# Altium PCB mainPower.PcbDoc
Units mil, origin at the board's own origin, x right, y up, seen from the top; angles counter-clockwise.
Board outline 2800 x 1865 mil, 2 copper layers (Top Layer, Bottom Layer), stack 65.792 mil thick; 57 components, 26 nets, 176 pads, 320 vias.
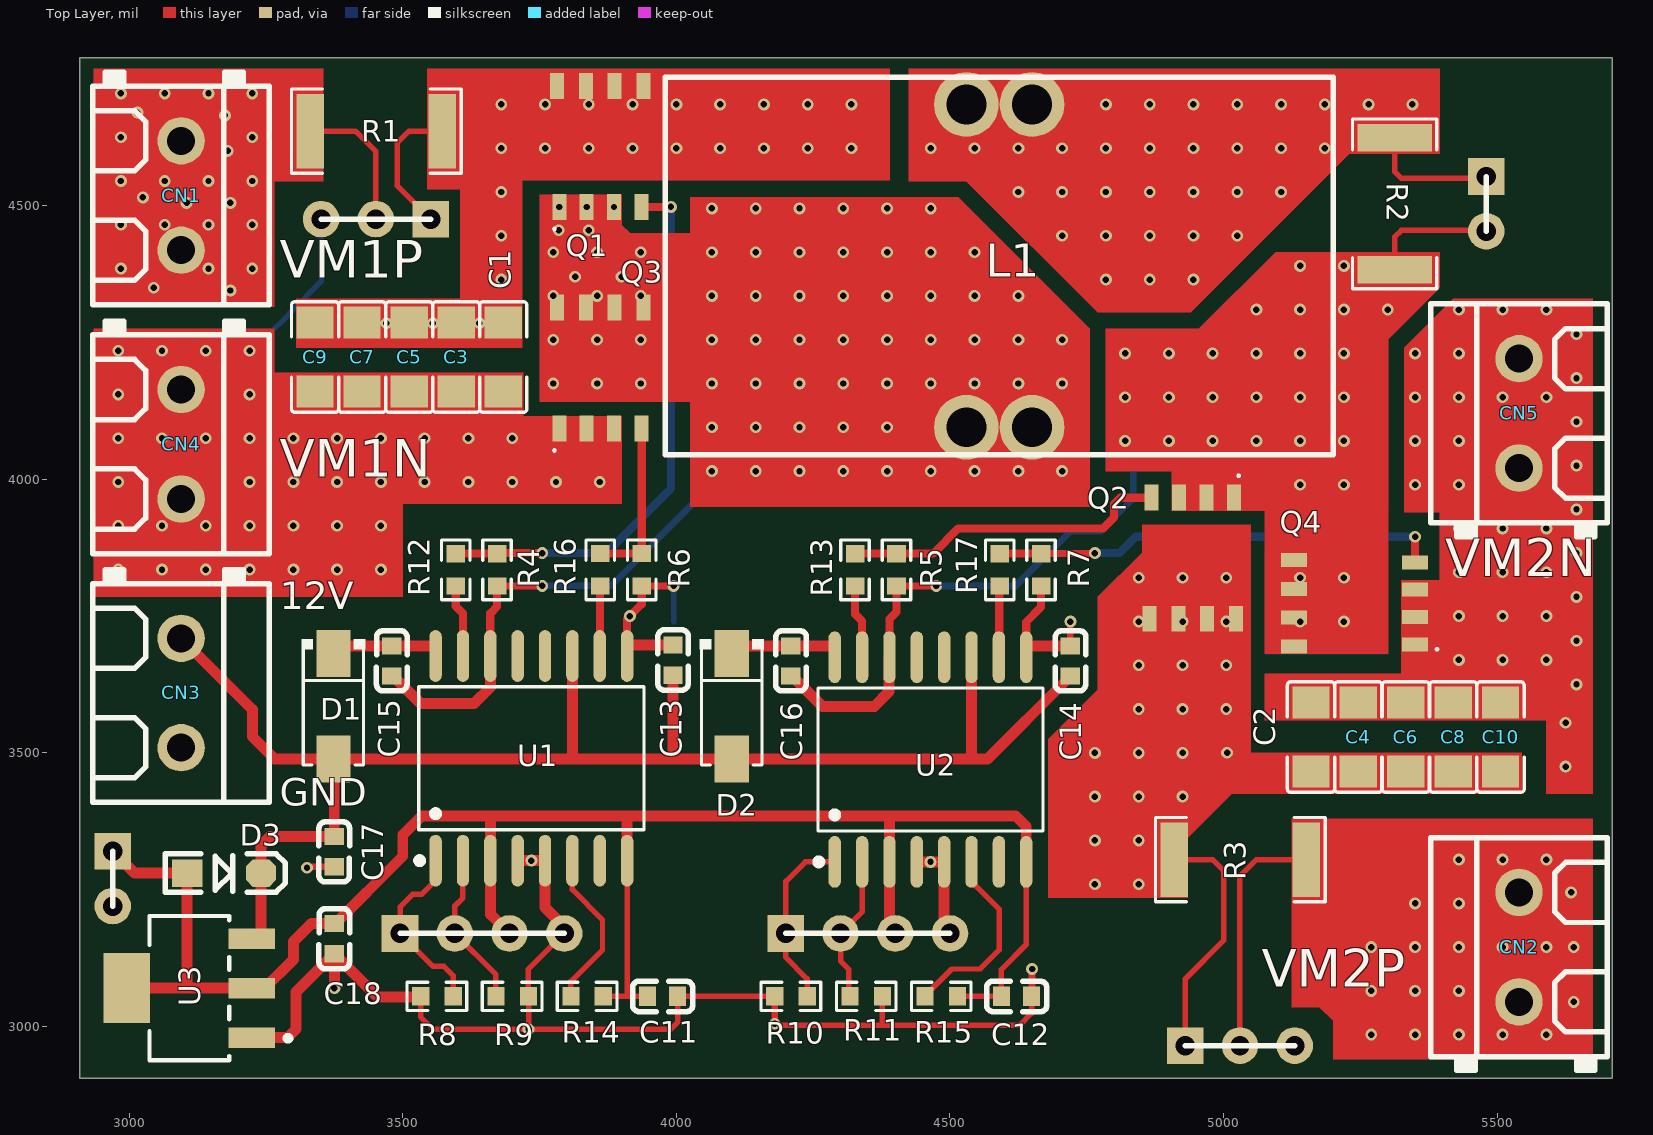
[diagram p0: Top Layer view]
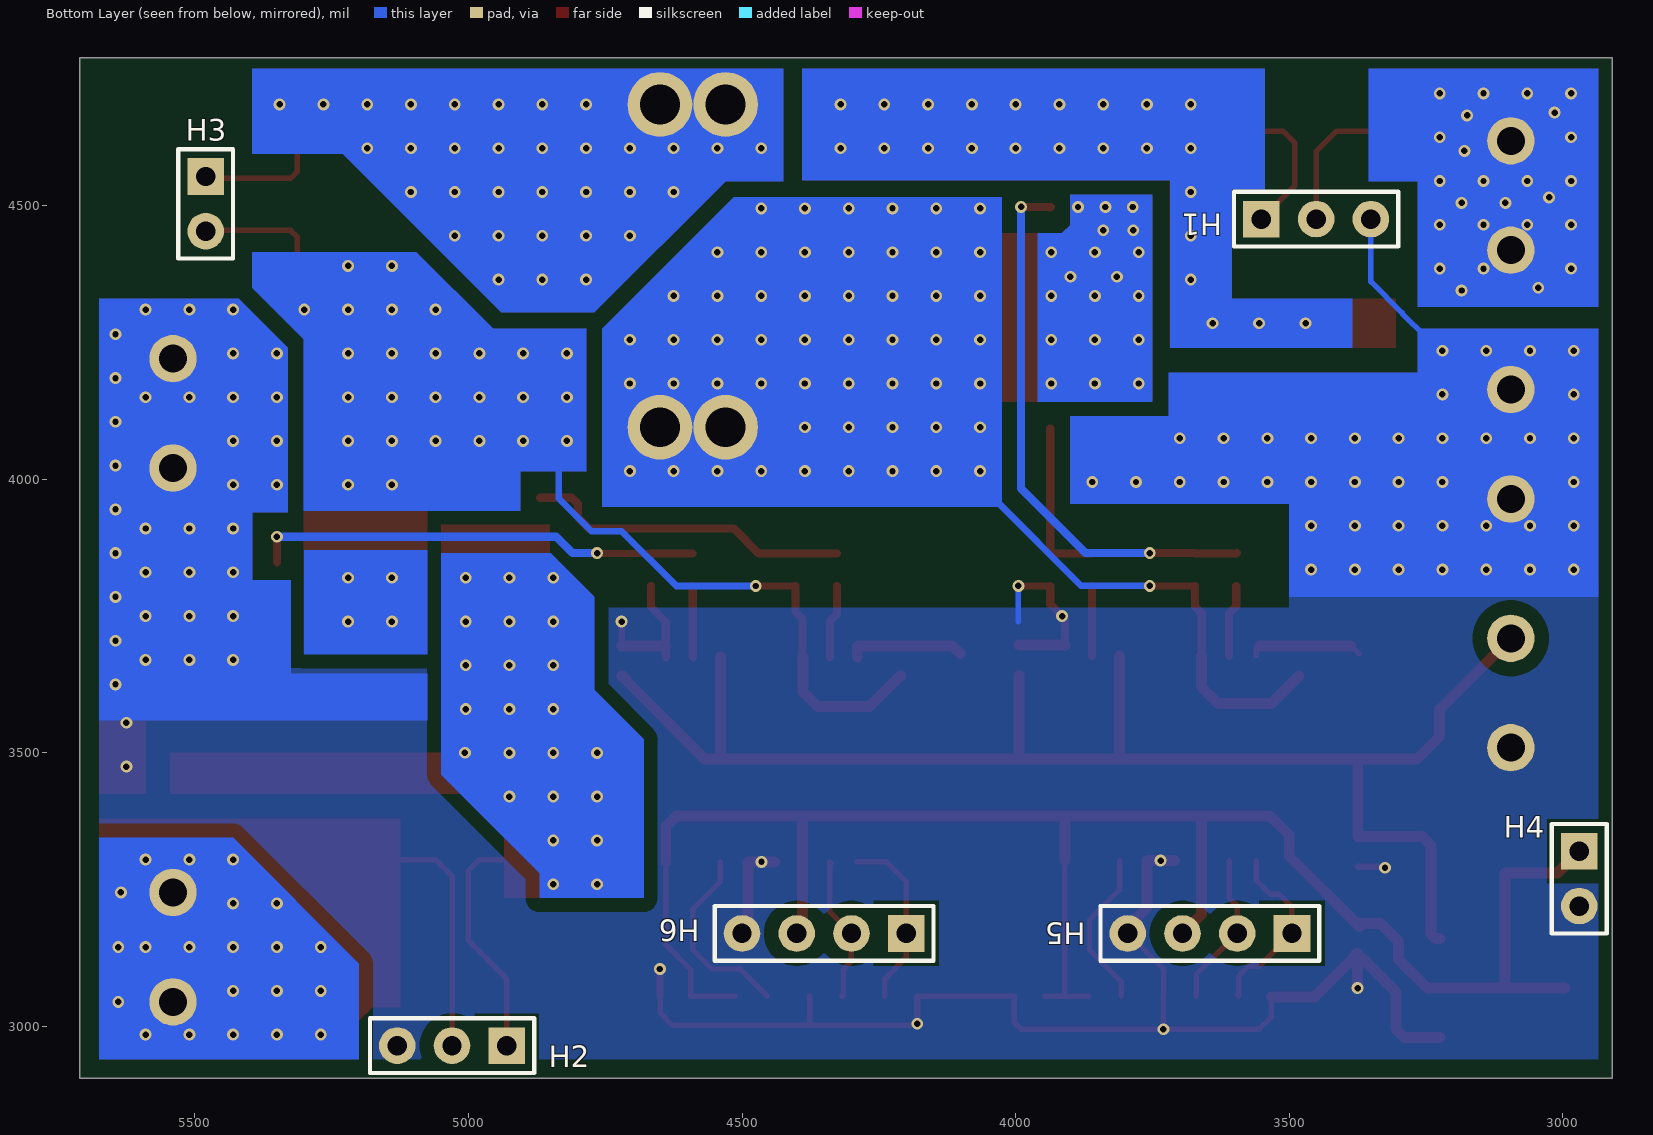
[diagram p1: Bottom Layer view, seen from below]

## Layer stack, top to bottom
Top Solder: solder mask 0.4, Solder Resist, Dk 3.5
Top Layer: signal copper 1.4
Dielectric 1: dielectric 62.9921, FR-4, Dk 4.8
Bottom Layer: signal copper 1.4
Bottom Solder: solder mask 0.4, Solder Resist, Dk 3.5

## Board outline
2910,2905 5710,2905 5710,4770 2910,4770

## Design rules (kind name [scope] priority, off if disabled: settings)
Clearance Clearance_1 [InNamedPolygon('C1N_L02_P000')] p1: gap=26 ignorepadtopadclearanceinfootprint=FALSE
Clearance [All] p2: gap=19.68 ignorepadtopadclearanceinfootprint=TRUE except(7.87: Arc-Arc Arc-Track Arc-SMDPad Arc-THPad Arc-Via Arc-Fill Arc-Poly Arc-Region Arc-Text Arc-Hole Track-Track Track-SMDPad Track-THPad Track-Via Track-Fill Track-Poly Track-Region Track-Text Track-Hole)
PolygonConnect PolygonConnect_3 [All vs IsNamedPolygon('C1N_L02_P000')] p1: connectstyle=Direct reliefconductorwidth=10 reliefentries=4 polygonreliefangle="90 Angle" airgapwidth=10
PolygonConnect PolygonConnect_2 [All vs IsNamedPolygon('NONET_L02_P000')] p2: connectstyle=Direct reliefconductorwidth=10 reliefentries=4 polygonreliefangle="90 Angle" airgapwidth=10
PolygonConnect PolygonConnect_1 [All vs IsNamedPolygon('NONET_L02_P000')] p3: connectstyle=Direct reliefconductorwidth=10 reliefentries=4 polygonreliefangle="90 Angle" airgapwidth=10
PolygonConnect [All] p4: connectstyle=Relief reliefconductorwidth=10 reliefentries=4 polygonreliefangle="90 Angle" airgapwidth=10
RoutingVias [All] p1: holewidth=28 width=50 viastyle="Through Hole" minholewidth=28 minwidth=50 maxholewidth=28 maxwidth=50
SolderMaskExpansion [All] p1: expansion=4 istentingtop=FALSE
Width [All] p1: maxlimit=50 minlimit=8 preferedwidth=15
30 further rules are at their usual default settings.

## Components (designator, comment, footprint, x,y, rotation, side; value= is the part's Value field where it differs from the comment)
C1 "22uF100V" C1206 3683.6,4223.36 r270 top
C2 "22uF100V" C1206 5159.66,3528.92 r90 top
C3 "22uF100V" C1206 3597.64,4223.36 r270 top
C4 "22uF100V" C1206 5246.32,3528.92 r90 top
C5 "22uF100V" C1206 3511.68,4223.36 r90 top
C6 "22uF100V" C1206 5332.99,3528.92 r270 top
C7 "22uF100V" C1206 3425.72,4223.36 r270 top
C8 "22uF100V" C1206 5419.65,3528.92 r90 top
C9 "22uF100V" C1206 3339.76,4223.36 r270 top
C10 "22uF100V" C1206 5506.32,3528.92 r90 top
C11 "470nF" C0603 3974.67,3055 r180 top
C12 "470nF" C0603 4621.67,3055 r180 top
C13 "470nF" C0603 3993.89,3669.43 r270 top
C14 "470nF" C0603 4720.16,3667.94 r270 top
C15 "100nF" C0603 3479.85,3667.94 r270 top
C16 "100nF" C0603 4209.38,3667.94 r270 top
C17 "1uF" C0603 3374.79,3319.43 r90 top
C18 "1uF" C0603 3375,3160.57 r90 top
CN1 "1729128" CONN-TH_2P-P5.08 3095,4518.58 r270 top
CN2 "1729128" CONN-TH_2P-P5.08 5540,3145 r90 top
CN3 "1729128" CONN-TH_2P-P5.08 3095,3609.42 r270 top
CN4 "1729128" CONN-TH_2P-P5.08 3095,4064 r270 top
CN5 "1729128" CONN-TH_2P-P5.08 5540,4120.37 r90 top
D1 "SS54" SMA 3373.25,3585.1 r90 top
D2 "SS54" SMA 4101.22,3585.1 r90 top
D3 "1N5819W(SOD-123)" SOD-123 3173.56,3280.29 r0 top
H1 "Header-Male-2.54_1x3" HDR2.54-LI-3P 3450.8,4475.49 r180 bottom
H2 "Header-Male-2.54_1x3" HDR2.54-LI-3P 5030,2965 r0 bottom
H3 "Header-Male-2.54_1x2" HDR2.54-LI-2P 5480.15,4503.3 r270 bottom
H4 "Header-Male-2.54_1x2" HDR2.54-LI-2P 2970,3270 r270 bottom
H5 "Header-Male-2.54_1x4" HDR2.54-LI-4P 3645,3170 r0 bottom
H6 "Header-Male-2.54_1x4" HDR2.54-LI-4P 4350,3170 r0 bottom
L1 "47uH 30A" 106-125立式 4530,4215 r0 top
Q1 "BSC070N10NS3 G" INF-PG-TDSON-8-1_V 3860.99,4608.81 r0 top
Q2 "BSC070N10NS3 G" INF-PG-TDSON-8-1_V 4943.64,3855.15 r180 top
Q3 "BSC070N10NS3 G" INF-PG-TDSON-8-1_V 3860.99,4203.78 r0 top
Q4 "BSC070N10NS3 G" INF-PG-TDSON-8-1_V 5238.62,3773.34 r90 top
R1 "0.0035 ohm" R2512 3451.71,4636.37 r0 top
R2 "0.0035 ohm" R2512 5312.82,4503.3 r270 top
R3 "0.0035 ohm" R2512 5030.72,3305 r0 top
R4 "10k" R0603 3672.34,3834.57 r90 top
R5 "10k" R0603 4402.3,3834.57 r270 top
R6 "10k" R0603 3936.62,3834.57 r90 top
R7 "10k" R0603 4666.58,3834.57 r90 top
R8 "10k" R0603 3562.38,3055 r180 top
R9 "10k" R0603 3700,3055 r0 top
R10 "10k" R0603 4209.38,3055 r180 top
R11 "10k" R0603 4347,3055 r0 top
R12 "10 ohm" R0603 3596.66,3834.57 r90 top
R13 "10 ohm" R0603 4326.63,3834.57 r90 top
R14 "3.3k" R0603 3837.05,3055 r180 top
R15 "3.3k" R0603 4484.05,3055 r180 top
R16 "10 ohm" R0603 3860.99,3834.57 r90 top
R17 "10 ohm" R0603 4590.95,3834.57 r90 top
U1 "SI8233BD-D-IS" SOIC-16_L10.3-W7.5-P1.27-LS10.3-BL 3735,3490 r0 top
U2 "SI8233BD-D-IS" SOIC-16_L10.3-W7.5-P1.27-LS10.3-BL 4464.4,3487.83 r0 top
U3 "TLV1117-50IDCY" FP-DCY0004A-MFG 3110,3070 r180 top

## Footprints (in the part's own frame and the unit in brackets; to place one, negate y for a bottom-side part, rotate by r counter-clockwise, add the part's x,y. Pads: shape width x height; smd on the part's side, far side on the other; paste and mask are expansions set on the pad)
106-125立式 [mm]
  round 3 hole 1.85: 1(0,-3.048) 1(3.048,-3.048) 2(0,11.938) 2(3.048,11.938)
  silkscreen extent -13.98,-4.32 17.02,13.21
C0603 [mm]
  rect 0.8x0.9 smd: 1(-0.7,0) 2(0.7,0)
  silkscreen extent -1.41,-0.71 1.39,0.72, body extent -0.8,-0.4 0.8,0.4, height 0.81
C1206 [mm]
  rect 1.485x1.728 smd: 1(-1.593,0) 2(1.593,0)
  silkscreen extent -2.56,-1.09 2.56,1.09, body extent -1.7,-0.91 1.7,0.91, height 0.89
CONN-TH_2P-P5.08 [mm]
  round 2.2 hole 1.3 mask+0.051: 1(-2.54,0) 2(2.54,0)
  silkscreen extent -5.72,-4.1 5.08,4.1
FP-DCY0004A-MFG [mm]
  rect 2.15x0.95 smd paste+0 mask+0: 1(-2.9,2.3) 2(-2.9,0) 3(-2.9,-2.3)
  rect 2.15x3.25 smd paste+0 mask+0: 4(2.9,0)
  silkscreen extent -4.7,-3.35 1.85,3.35, body extent -4.08,-3.45 4.08,3.45, height 0.25
HDR2.54-LI-2P [mm] "排针，2脚"
  rect 1.7x1.7 hole 0.9: 1(-1.27,0)
  round 1.7 hole 0.9: 2(1.27,0)
  silkscreen extent -2.54,-1.27 2.54,1.27, body extent -2.54,-1.27 2.54,1.27, height 8.5
HDR2.54-LI-3P [mm] "排针，3脚"
  rect 1.7x1.7 hole 0.9: 1(-2.54,0)
  round 1.7 hole 0.9: 2(0,0) 3(2.54,0)
  silkscreen extent -3.81,-1.27 3.81,1.27, body extent -3.81,-1.27 3.81,1.27, height 8.5
HDR2.54-LI-4P [mm] "排针，4脚"
  rect 1.7x1.7 hole 0.9: 1(-3.81,0)
  round 1.7 hole 0.9: 2(-1.27,0) 3(1.27,0) 4(3.81,0)
  silkscreen extent -5.08,-1.27 5.08,1.27, body extent -5.08,-1.27 5.08,1.27, height 8.5
INF-PG-TDSON-8-1_V [mm] "TDSON, 8-Leads, Body 6.15x5.15mm, Pitch 1.27mm"
  rect 0.65x1.2 smd: 1(-1.905,-2.825) 2(-0.635,-2.825) 3(0.635,-2.825) 4(1.905,-2.825) 5(2.007,2.794) 6(0.66,2.794) 7(-0.66,2.794) 8(-2.007,2.794)
  Top Layer region: 0.315,2.925 1.015,2.925 1.015,3.425 0.315,3.425
  Top Layer region: -1.015,2.925 -0.315,2.925 -0.315,3.425 -1.015,3.425
  Top Layer region: 1.65,2.925 2.35,2.925 2.35,3.425 1.65,3.425
  Top Layer region: -2.35,2.925 -1.65,2.925 -1.65,3.425 -2.35,3.425
  Top Layer region: -2.35,2.925 -2.35,-1.575 2.35,-1.575 2.35,2.925
  silkscreen extent -2.23,-3.94 -2.03,-3.74, body extent -2.58,-3.08 2.58,3.08, height 1
R0603 [mil]
  rect 31.75x34.02 smd: 1(-29.66,0) 2(29.65,0)
  silkscreen extent -55,-26 55,26, body extent -31,-16 31,16, height 9
R2512 [mil]
  rect 50.49x136.06 smd: 1(-120.72,0) 2(120.72,0)
  silkscreen extent -155,-77 155,77, body extent -124,-63 124,63, height 24
SMA [mm]
  rect 2.185x1.593 smd: 1(-2.442,0) 2(2.442,0)
  silkscreen extent -2.73,-1.48 3.11,1.48, body extent -2.6,-1.3 2.6,1.3, height 2
SOD-123 [mil] "2.7x1.6X1.1mm（长宽高，不包括引脚）"
  rect 55x50 smd: 1(-67.5,0)
  oct 55x50 smd: 2(67.5,0)
  silkscreen extent -108,-35 112,35, body extent -73,-31 73,31, height 48
SOIC-16_L10.3-W7.5-P1.27-LS10.3-BL [mil]
  oval 22.6x94.51 smd: 1(-175,-187.02) 2(-125,-187.02) 3(-75,-187.02) 4(-25,-187.02) 5(25,-187.02) 6(75,-187.02) 7(125,-187.02) 8(175,-187.02) 9(175,187.02) 10(125,187.02) 11(75,187.02) 12(25,187.02) 13(-25,187.02) 14(-75,187.02) 15(-125,187.02) 16(-175,187.02)
  silkscreen extent -210,-193 206,131

## Part data
C1 C2 C3 C4 C5 C6 C7 C8 C9 C10: library part C1206, BOM_JLCPCB Part Class="Basic Part", BOM_Manufacturer=FH, BOM_Manufacturer Part=1206B102K202NT, BOM_Supplier=LCSC, BOM_Supplier Part=C9196, nameAlias=Capacitance, spicePre=C, spiceSymbolName=1206B102K202NT
C11 C12 C13 C14 C15 C16 C17 C18: library part C0603, BOM_JLCPCB Part Class="Basic Part", BOM_Manufacturer=YAGEO, BOM_Manufacturer Part=CC0603KRX7R9BB104, BOM_Supplier=LCSC, BOM_Supplier Part=C14663, nameAlias=Capacitance, spicePre=C, spiceSymbolName=CC0603KRX7R9BB104
CN1 CN2 CN3 CN4 CN5: library part MKDSN5.08-2P, "间距:5.08mm;排数:1;每排PIN数:2;安装方式:直针;额定电流:13.5A;额定电压:400V;工作温度范围:-;颜色:绿色;", Color=绿色, Current Rating (Max)=13.5A, JLCPCB Part Class="Extended Part", LCSC Part Name="5.08mm 排数:1 每排P数:2 直针", Manufacturer="Phoenix Contact(菲尼克斯)", Operating Temperature Range=-, Voltage Rating (Max)=400V, Add into BOM=yes, Convert to PCB=yes, Datasheet=https://atta.szlcsc.com/upload/public/pdf/source/20161226/1482720163948.pdf, Device=1729128, Manufacturer Part=1729128, Mounting Style=直针, Number of PINs Per Row=2, Number of Rows=1, Pitch=5.08mm, Supplier=LCSC, Supplier Footprint=插件,P=5.08mm, Supplier Part=C91153, Symbol=MKDSN1.5/2-5.08
D1 D2: library part SS34(SMA), BOM_JLCPCB Part Class="Extended Part", BOM_Manufacturer=Doeshare(德芯), BOM_Manufacturer Part=SS34, BOM_Supplier=LCSC, BOM_Supplier Part=C2931787, Contributor=LCSC, spicePre=D, spiceSymbolName=SS34_C2931787
D3: BOM_JLCPCB Part Class="Extended Part", BOM_Manufacturer=Doeshare(德芯), BOM_Manufacturer Part=SS34, BOM_Supplier=LCSC, BOM_Supplier Part=C2931787, Contributor=LCSC, spicePre=D, spiceSymbolName=SS34_C2931787
H1 H2 H3 H4: BOM_JLCPCB Part Class="Extended Part", BOM_Manufacturer=BOOMELE, BOM_Manufacturer Part="Header2.54mm 1*3P", BOM_Supplier=LCSC, BOM_Supplier Part=C49257, spicePre=H, spiceSymbolName=Header-Male-2.54_1x3
H5 H6: BOM_JLCPCB Part Class="Extended Part", BOM_Manufacturer="Boom Precision Elec", BOM_Manufacturer Part=C247921, BOM_Supplier=LCSC, BOM_Supplier Part=C247921, Contributor=LCSC, spicePre=H, spiceSymbolName=C247921
L1: library part 106-125铁硅铝磁环电感, BOM_JLCPCB Part Class="Extended Part", BOM_Manufacturer=FH(风华), BOM_Manufacturer Part=HA42-4R7MT, BOM_Supplier=LCSC, BOM_Supplier Part=C2936653, Contributor=LCSC, nameAlias=Inductance, spicePre=L, spiceSymbolName=HA42-4R7MT
Q1 Q2 Q3 Q4: library part BSC070N10NS3G, "N-Channel OptiMOS 3 Power-Transistor, 100 V VDS, 90 A ID, -55 to 150 degC, PG-TDSON-8-1, Reel, Green", Manufacturer=Infineon, ComponentLink1Description="Manufacturer URL", ComponentLink1URL=http://www.infineon.com/, ComponentLink2Description=Datasheet, ComponentLink2URL=http://www.infineon.com/dgdl/BSC070N10NS3+Rev2+1.pdf?folderId=db3a304313b8b5a60113cee8763b02d7&fileId=db3a304327b89750012824712c6c6f2f, ComponentLink3Description="Package Specification", ComponentLink3URL=http://www.infineon.com/cms/packages/SMD_-_Surface_Mounted_Devices/P-PG-TDSON/P-PG-TDSON-08-01x_2x_3.html?__locale=en, DatasheetVersion="Rev. 2.0", Green=TRUE, Halogen-free=TRUE, ID (max)="90Â A", IDpuls (max)="360Â A", Manufacturer Part Number=BSC070N10NS3G, Mounting Technology="Surface Mount", PackageDescription="8-Pin Plastic (Green) Thin Dual Small Outline Non-Leaded Package, 5.15 x 5.9 mm Body, 1.27 mm Pitch", PackageReference=PG-TDSON-8-1, Packing=Reel, PartNumber="BSC070N10NS3 G", Polarity=N, Ptot (max)="114Â W", QG="42Â nC", RDS (on) (max)="7Â mOhm", Rth="1.1Â K/W", RthJA (max)="50Â K/W", RthJC (max)="1.1Â K/W", VDS (max)="100Â V", VGS(th) (max)="3.5Â V", VGS(th) (min)="2Â V"
R1 R2 R3: library part R2512, BOM_JLCPCB Part Class="Extended Part", BOM_Manufacturer=YAGEO, BOM_Manufacturer Part=SR2512FK-0751RL, Resistance=51Ω, BOM_Supplier=LCSC, BOM_Supplier Part=C375694, Contributor=LCSC, nameAlias="Resistance (Ohms)", spicePre=R, spiceSymbolName=SR2512FK-0751RL
R4 R5 R6 R7 R8 R9 R10 R11 R12 R13 R14 R15 R16 R17: library part R0603, BOM_JLCPCB Part Class="Extended Part", BOM_Manufacturer=YAGEO, BOM_Manufacturer Part=SR0603JR-071RL, Resistance=1Ω, BOM_Supplier=LCSC, BOM_Supplier Part=C326890, Contributor=LCSC, nameAlias="Resistance (Ohms)", spicePre=R, spiceSymbolName=SR0603JR-071RL
U1 U2: "高速隔离半桥栅极驱动器", JLCPCB Part Class="Extended Part", Manufacturer="SILICON LABS(芯科)", Add into BOM=yes, Convert to PCB=yes, Datasheet=https://atta.szlcsc.com/upload/public/pdf/source/20190920/C430246_81ACDC97509C517087989819A83AC3BD.pdf, Device=SI8233BD-D-IS, LCSC Part Name=SI8233BD-D-IS, Manufacturer Part=SI8233BD-D-IS, Name=SI8233BD-D-IS, Supplier=LCSC, Supplier Footprint=SOIC-16_W, Supplier Part=C430246, Symbol=SI8233BD-D-IS
U3: library part CMP-04917-000165-1, "IC REG LINEAR 5V 800MA SOT223-4", Case/Package=SOT-223, Dropout Voltage=1.2V, Input Bias Current=5mA, Max Input Voltage=15V, Max Operating Temperature=125°C, Max Output Current=800mA, Min Input Voltage=6.4V, Min Operating Temperature=-40°C, Nominal Output Voltage=5V, Package Quantity=80, Quiescent Current=15mA, Reference Voltage=5.2V, Height=1.7mm, Lead Free="Lead Free", Length=6.7mm, Min Current Limit=800mA, Mount="Surface Mount", Number of Outputs=1, Number of Pins=3, Number of Regulators=1, Output Current=800mA, Output Type=Fixed, Output Voltage=5V, Packaging=Rail/Tube, Polarity=Positive, Radiation Hardening=No, REACH SVHC="No SVHC", RoHS Compliant=Yes, Series=-, Width=3.7mm

## Via types
v1: diameter 21.65, hole 11.81, Top Layer to Bottom Layer, 320 vias

## Nets (pads, with @x,y where several pads share a name; then routed paths per layer and width w, separated by ;. In a path a pad name is that pad's centre, name@x,y a point inside that pad or via, vN(x,y) a via of type N, cw(c..) or ccw(c..) an arc to the next point about the centre after c; other vN are vias at no path point)
+5: C11.2 C12.2 C18.2 D3.1 H4.1 H5.3 H6.3 R14.1 R15.1 U1.3 U1.8 U2.3 U2.8 U3.2 U3.4 | length 3460.6
  Top Layer w10: R14.1 3906.91,3055 ; U1.8 3910,3058.09 3906.91,3055 ; C11.2 3906.91,3055 ; 4389.4,3385 4394.4,3385 ; R15.1 C12.2 4594.11,3104.11 4639.4,3149.4 U2.8
  Top Layer w20: H4.1 3009.71,3280.29 D3.1 3106.06,3073.94 3110,3070 ; U3.4 3110,3070 ; C18.2@3371.23,3182.39 3500,3311.16 3500,3350 3535,3385 3660,3385 ; C18.2 3333.13,3188.13 3300.12,3155.12 3300.12,3122.32 3247.8,3070 U3.2 3110,3070 ; H5.3 3660,3205 U1.3 3660,3385 ; U1.8 3910,3385 ; H6.3@4389.4,3170 U2.3 4389.4,3385 3910,3385 ; 4394.4,3385 4620,3385 4639.4,3365.6 U2.8 ; 3660,3385 3910,3385
+12: C13.2 C14.2 C17.2 CN3.1 D1.1 D2.1 D3.2 U1.11 U2.11 U3.3 | length 2801.9
  Top Layer w20: CN3.1 3225,3579.42 3225,3530 3266.06,3488.94 D1.1 ; U3.3 3232.35,3160.55 3241.06,3169.25 D3.2 3241.06,3331.06 3256.98,3346.98 C17.2 3374.79,3487.4 D1.1 ; U1.11 3810,3488.94 ; C13.2 3993.89,3490.05 3995,3488.94 ; U2.11 4539.4,3489.54 4540,3488.94 ; C14.2@4720,3640.22 4718.03,3640.22 4712.45,3634.64 4712.45,3632.67 4568.72,3488.94 4540,3488.94 ; D1.1 3810,3488.94 ; 3810,3488.94 3888.94,3488.94 3995,3488.94 ; 3995,3488.94 D2.1 4540,3488.94
A_HS: C15.2 L1.1 Q1.1 Q1.2 Q1.3 Q3.5 Q3.6 Q3.7 Q3.8 R4.1 U1.14 | length 833.3
  Top Layer w10: C15.2 C15.2@3481.82,3640.38
  Top Layer w12.13: R4.1 3755,3804.91 v1@3755,3805
  Top Layer w15: U1.14 3660,3755 3672.34,3767.34 R4.1
  Top Layer w20: C15.2@3481.82,3640.38 3532.2,3590 3630,3590 3660,3620 U1.14
  Bottom Layer w12.13: v1(3755,3805.09) 3880.09,3805.09 4037.05,3962.05
  other v1: 4065,4015 4145,4015 4225,4015 4305,4015 4385,4015 4465,4015 4545,4015 4625,4015 4705,4015 4065,4095 4145,4095 4225,4095 4305,4095 4385,4095 3775,4175 3855,4175 3935,4175 4065,4175 4145,4175 4225,4175 4305,4175 4385,4175 4465,4175 4545,4175 4625,4175 4705,4175 3775,4255 3855,4255 3935,4255 4065,4255 4145,4255 4225,4255 4305,4255 4385,4255 4465,4255 4545,4255 4625,4255 4705,4255 3775,4335 3855,4335 3935,4335 4065,4335 4145,4335 4225,4335 4305,4335 4385,4335 4465,4335 4545,4335 4625,4335 3815,4370 3900,4370 3775,4415 3855,4415 3935,4415 4065,4415 4145,4415 4225,4415 4305,4415 4385,4415 4465,4415 4545,4415 3785,4455 3840,4455 4065,4495 4145,4495 4225,4495 4305,4495 4385,4495 4465,4495 3785.99,4497.59 3835.99,4497.59 3885.99,4497.59
AmosH: Q1.4 R4.2 R12.2 | length 1018.3
  Top Layer w10: R4.2 R4.2@3673.12,3865
  Top Layer w12.13: Q1.4 Q1.4@3938.49,4495.09 ; v1@3990,4497.59 v1(3990,4497.68) v1@3990,4500
  Top Layer w15: R12.2@3595.83,3865.06 R12.2 R4.2 ; R4.2@3673.12,3865 v1@3755,3865 ; Q1.4 v1@3990,4497.59
  Bottom Layer w15: v1(3755,3865.09) 3872.07,3865.09 3990,3983.02 v1(3990,4497.68)
AmosL: Q3.4 R6.2 R16.2 | length 306
  Top Layer w10: R16.2@3860,3865.21 R16.2
  Top Layer w12.13: Q3.4 Q3.4@3936.62,4092.55
  Top Layer w15: R16.2 R6.2 Q3.4@3936.62,4092.55
B_HS: C16.2 H3.2 Q2.1 Q2.2 Q2.3 Q4.5 Q4.6 Q4.7 Q4.8 R2.2 R5.2 U2.14 | length 1214.4
  Top Layer w10: R2.2 5312.82,4442.82 5325,4455 5478.46,4455 H3.2
  Top Layer w12.13: R5.2 v1(4474.91,3804.91) v1@4475,3805
  Top Layer w15: U2.14 4389.4,3744.4 4402.3,3757.3 R5.2
  Top Layer w20: C16.2 4211.35,3640.38 4266.73,3585 4361.64,3585 4388.91,3612.27 4388.91,3674.35 U2.14
  Bottom Layer w12.13: v1(4474.91,3804.91) 4619.91,3804.91 4720,3905 4775,3905 4835,3965 4835,4035
  other v1: 5140,3740 5220,3740 5140,3820 5220,3820 5140,3990 5220,3990 4820,4070 4900,4070 4980,4070 5060,4070 5140,4070 5220,4070 4820,4150 4900,4150 4980,4150 5060,4150 5140,4150 5220,4150 4820,4230 4900,4230 4980,4230 5060,4230 5140,4230 5220,4230 5060,4310 5140,4310 5220,4310 5300,4310 5140,4390 5220,4390
BmosH: Q2.4 R5.1 R13.2 | length 599.2
  Top Layer w12.13: 4469.61,3864.22 4469.61,3864.61
  Top Layer w15: R13.2 R5.1 4469.61,3864.22 ; 4469.61,3864.61 4515,3910 4780,3910 4800,3930 4800,3955 4811.37,3966.37 Q2.4
BmosL: Q4.4 R7.2 R17.2 | length 818.5
  Top Layer w12.13: R7.2 4764.22,3864.22 v1(4765,3865) ; Q4.4 Q4.4@5350,3848.5
  Top Layer w15: R17.2 R7.2 ; Q4.4@5350,3848.5 v1(5350,3895)
  Bottom Layer w15: v1(4765,3865) 4810,3865 4840,3895 v1(5350,3895)
C1N: C1.2 C2.2 C3.2 C4.2 C5.1 C6.1 C7.2 C8.2 C9.2 C10.2 C11.1 C12.1 C13.1 C14.1 C17.1 C18.1 CN3.2 CN4.1 CN4.2 CN5.1 CN5.2 H1.3 H2.3 H4.2 H5.4 H6.4 Q3.1 Q3.2 Q3.3 Q4.1 Q4.2 Q4.3 R6.1 R7.1 R8.2 R9.2 R10.2 R11.2 U1.4 U1.5 U1.9 U2.4 U2.5 U2.9 U3.1 | length 3433.9
  Top Layer w10: R8.2 3532.72,3017.28 3555,2995 v1(3730,2995) ; H5.4 3729.66,3104.66 R9.2 3730,3054.66 v1(3730,2995) ; R10.2 C11.1 4002.22,3007.22 3990,2995 v1(3730,2995) ; v1@4181.49,3002.04 4182.22,3002.77 4190.19,3002.77 4190.93,3002.04 4375,3002.04 ; R11.2@4376.66,3056.13 R11.2 4376.66,3003.69 4375,3002.04 ; C12.1 4649.22,3024.22 4627.04,3002.04 4375,3002.04
  Top Layer w12.13: v1(3325,3290) 3325,3291.87 C17.1 ; R6.1 3995,3804.91 v1(3995,3805) ; v1(4179.73,3005) R10.2 ; C12.1 4650,3055 v1(4650,3105) ; v1(4720,3740) 4720.08,3739.92 4720.08,3695.58 C14.1
  Top Layer w15: U1.9@3910,3695.78 3910,3745 3936.62,3771.62 R6.1 ; U2.9 4639.4,3694.3 4639.4,3739.4 4666.58,3766.58 R7.1
  Top Layer w20: U3.1 3289.45,2979.45 3305,2995 3305,3063.02 C18.1@3367.28,3125.3 ; v1(3375,3070) C18.1 3376.97,3133.02 3382.72,3127.27 3382.72,3125.3 3454.15,3053.87 R8.2@3532.72,3053.87 ; U1.4 v1(3735,3302.98) U1.5 3760,3217.7 3795,3182.7 H5.4 ; U1.9@3910,3695.78 3911.2,3696.98 C13.1 ; U2.4 v1(4464.4,3300.81) U2.5 H6.4@4489.4,3170 ; U2.9@4639.4,3694.3 4640.6,3695.5 C14.1
  Bottom Layer w10: v1(3220,4235) 3245,4260 3250.48,4260 3293.62,4303.14 3293.62,4304.19 3350.8,4361.37 H1.3 ; 3995,3740 v1(3995,3805)
  other v1: 5625,3475 5625,3555 5645,3625 5430,3670 5510,3670 5590,3670 5645,3705 3915,3750 5430,3750 5510,3750 5590,3750 5645,3785 5430,3830 5510,3830 5590,3830 2980,3835 3060,3835 3140,3835 3220,3835 3300,3835 3380,3835 3460,3835 5645,3865 5430,3910 5510,3910 5590,3910 2980,3915 3060,3915 3140,3915 3220,3915 3300,3915 3380,3915 3460,3915 5645,3945 5350,3990 5430,3990 2980,3995 3220,3995 3300,3995 3380,3995 3460,3995 3540,3995 3620,3995 3700,3995 3780,3995 3860,3995 5645,4025 5350,4070 5430,4070 2980,4075 3060,4075 3140,4075 3220,4075 3300,4075 3380,4075 3460,4075 3540,4075 3620,4075 3700,4075 5645,4105 5350,4150 5430,4150 5510,4150 5590,4150 2980,4155 3220,4155 5645,4185 5350,4230 5430,4230 2980,4235 3060,4235 3140,4235 5645,4265 5430,4310 5510,4310 5590,4310
C1P: C1.1 C3.1 C5.2 C7.1 C9.1 H1.1 Q1.5 Q1.6 Q1.7 Q1.8 R1.2 | length 256
  Top Layer w10: H1.1 3490,4536.28 3490,4615 3511.37,4636.37 R1.2
  other v1: 3470,4285 3555,4285 3640,4285 3680,4365 3680,4445 3680,4525 3680,4605 3760,4605 3840,4605 3920,4605 4000,4605 4080,4605 4160,4605 4240,4605 4320,4605 3680,4685 3760,4685 3840,4685 3920,4685 4000,4685 4080,4685 4160,4685 4240,4685 4320,4685
C2P: C2.1 C4.1 C6.2 C8.1 C10.1 H2.1 Q2.5 Q2.6 Q2.7 Q2.8 R3.1 | length 447.3
  Top Layer w10: R3.1 4980,3305 5000,3285 5000,3157.18 4930,3087.18 H2.1
  other v1: 4765,3260 4845,3260 4765,3340 4845,3340 4765,3420 4845,3420 4925,3420 4765,3500 4845,3500 4925,3500 5006.54,3500.21 4845,3580 4925,3580 5005,3580 4845,3660 4925,3660 5005,3660 4845,3740 4925,3740 5005,3740 4845,3820 4925,3820 5005,3820
Iin+: CN1.1 CN1.2 H1.2 R1.1 | length 258.9
  Top Layer w10: R1.1 3413.63,4636.37 3450.8,4599.2 H1.2
  other v1: 3185,4345 3045,4350 2985,4385.09 3145,4385.09 3225,4385.09 2985,4465.09 3065,4465.09 3145,4465.09 3225,4465.09 3105,4505 3185,4505 3025,4515 2985,4545.09 3065,4545.09 3145,4545.09 3225,4545.09 3180,4600 2985,4625.09 3225,4625.09 3175,4665 3015,4670 2985,4705.09 3065,4705.09 3145,4705.09 3225,4705.09
IL+: H3.1 L1.2 R2.1 | length 235.6
  Top Layer w10: R2.1 5312.82,4562.18 5325,4550 5476.85,4550 H3.1
  other v1: 4785,4365 4865,4365 4945,4365 4705,4445 4785,4445 4865,4445 4945,4445 5025,4445 4625,4525 4705,4525 4785,4525 4865,4525 4945,4525 5025,4525 5105,4525 4465,4605 4545,4605 4625,4605 4705,4605 4785,4605 4865,4605 4945,4605 5025,4605 5105,4605 5185,4605 4785,4685 4865,4685 4945,4685 5025,4685 5105,4685 5185,4685 5265,4685 5345,4685
Iout-: CN2.1 CN2.2 H2.2 R3.2 | length 444.2
  Top Layer w10: H2.2@5029.19,2965 5029.19,3274.19 5060,3305 R3.2
  other v1: 5270,2985 5350,2985 5430,2985 5510,2985 5590,2985 5640,3045 5270,3065 5350,3065 5430,3065 5270,3145 5350,3145 5430,3145 5510,3145 5590,3145 5640,3145 5350,3225 5430,3225 5635,3245 5430,3305 5510,3305 5590,3305
NetC15_1: C15.1 D1.2 U1.16 | length 207.7
  Top Layer w10: D1.2 D1.2@3387.48,3695.49 ; U1.16@3554.18,3695.49 3560,3689.67 U1.16
  Top Layer w20: D1.2@3387.48,3695.49 C15.1 U1.16@3554.18,3695.49
NetC16_1: C16.1 D2.2 U2.16 | length 214
  Top Layer w20: D2.2 4115.45,3695.49 C16.1 4288.2,3695.49 4289.4,3694.29 U2.16
NetR12_1: R12.1 U1.15 | length 133.4
  Top Layer w15: R12.1 3596.66,3768.34 3610,3755 U1.15
NetR13_1: R13.1 U2.15 | length 135.4
  Top Layer w15: R13.1 4326.63,3753.37 4339.4,3740.6 U2.15
NetR14_2: R14.2 U1.6 | length 294.6
  Top Layer w10: R14.2 3807.39,3082.39 3865,3140 3865,3195 3810.08,3249.92 3810.08,3302.9 U1.6
NetR15_2: R15.2 U2.6 | length 353.2
  Top Layer w10: R15.2 4454.39,3056.13 4503.26,3105 4555,3105 4590,3140 4590,3214.26 4539.4,3264.85 U2.6
NetR16_1: R16.1 U1.10 | length 128.3
  Top Layer w15: U1.10 3860.49,3677.51 3860.49,3804.42 R16.1
NetR17_1: R17.1 U2.10 | length 130.7
  Top Layer w15: U2.10 4590.18,3675.62 4590.18,3804.14 R17.1
PWMAH: H5.1 R8.1 U1.1 | length 340.1
  Top Layer w10: U1.1 3560,3267.03 3534.51,3241.54 3518.07,3241.54 3495,3218.46 H5.1 3555,3110 3575,3110 3592.03,3092.97 R8.1 R8.1@3594.62,3057.58
PWMAL: H5.2 R9.1 U1.2 | length 285.4
  Top Layer w10: U1.2 3610,3235 3595,3220 H5.2 3670.34,3094.66 R9.1
PWMBH: H6.1 R10.1 U2.1 | length 330.4
  Top Layer w10: R10.1 4239.03,3087.01 4200,3126.04 H6.1 4200,3265 4235.81,3300.81 U2.1
PWMBL: H6.2 R11.1 U2.2 | length 272.7
  Top Layer w10: R11.1 4315,3057.35 4315,3105 4300,3120 H6.2 4339.4,3209.4 U2.2 U2.2@4336.99,3298.4
pads on no net: U1.7 U1.12 U1.13 U2.7 U2.12 U2.13

## Polygon pours and split planes (outlines as drawn)
C1N on Bottom Layer "C1N_L02_P000" (solid, remove dead copper, pour order 0): 2935,3810 3500,3810 3500,3765 4970,3765 4970,3655 5675,3655 5675,2940 2935,2940 2935,3145

## Other copper
Top Layer:
  region net C1N: 5075,3645 5075,3560 5675,3560 5675,4330 5420,4330 5330,4240 5330,3940 5395,3940 5395,3815 5325,3815 5325,3645
  region net A_HS: 3895,4470 3920,4445 3895,4445
  region net C2P: 4935,3235 4680,3235 4680,3525 4770,3615 4770,3785 4851.12,3866.12 4851.12,3917.16 5050,3917.16 5050,3500 5545,3500 5545,3425 5015,3425 4935,3345
  region net C1P: 3305,4330 3305,4240 3717.93,4240 3717.93,4546.8 4390,4546.8 4390,4750 3630,4750 3605,4750 3605,4330
  region net C1P: 3617.5,4750 3545,4750 3545,4530 3620,4530
  region net A_HS: 3945,4450 4025,4450 4025,4515 4515,4515 4755,4275 4755,3950 4025,3950 4025,4141.77 3945,4141.77
  region net IL+: 4425,4545 4425,4750 5395,4750 5395,4595 5230,4595 4940,4305 4770,4305 4530,4545
  region net Iin+: 2935,4315 3265,4315 3265,4545 3355,4545 3355,4750 3280,4750 2935,4750
  region net C1N: 5675,3425 5590,3425 5590,3570 5675,3570
  region net Iout-: 5125,3035 5175,3035 5200,3010 5200,2940 5675,2940 5675,3380 5125,3380
  region net B_HS: 5395,4415 5095,4415 4955,4275 4785,4275 4785,4015 4905,4015 4905,3942.25 5075,3942.25 5075,3680.82 5300.62,3680.82 5300.62,4255.62 5395,4350
  region net A_HS: 3750,4520 3750,4141.77 3960,4141.77 3960,4450 3900,4450 3900,4520
  region net C1N: 2935,4275 2935,3785 3500,3785 3500,3955 3900,3955 3900,4115 3720,4115 3720,4195 3265,4195 3265,4275
Bottom Layer:
  region net A_HS: 3895,4470 3920,4445 3895,4445
  region net C1P: 3385,4330 3385,4240 3717.44,4240 3717.44,4546.32 4390,4546.32 4390,4750 3630,4750 3605,4750 3605,4330
  region net C1P: 3617.5,4750 3545,4750 3545,4530 3620,4530
  region net A_HS: 4025,4515 4025,3950 4755,3950 4755,4275 4515,4515
  region net IL+: 4425,4545 4425,4750 5395,4750 5395,4595 5230,4595 4940,4305 4770,4305 4530,4545
  region net Iin+: 2935,4315 3265,4315 3265,4460 3265,4545 3355,4545 3355,4750 3280,4750 2935,4750
  region net C1N: 5075,3645 5075,3560 5675,3560 5675,4330 5420,4330 5330,4240 5330,3940 5395,3940 5395,3815 5325,3815 5325,3645
  region net Iout-: 5200,3115 5200,2940 5675,2940 5675,3345 5430,3345
  region net C2P: 4770,3785 4850,3865 5050,3865 5050,3520 5050,3460 4870,3280 4870,3235 4680,3235 4680,3525 4770,3615
  region net B_HS: 5300,3680 5300,3870 5075,3870 5075,3680
  region net B_HS: 5395,4415 5095,4415 4955,4275 4785,4275 4785,4015 4905,4015 4905,3942.6 5300.62,3942.6 5300.62,4255.62 5395,4350
  region net A_HS: 3750,4520 3750,4141.77 3960,4141.77 3960,4450 3900,4450 3900,4520
  region net C1N: 2935,4275 2935,3785 3500,3785 3500,3955 3900,3955 3900,4115 3720,4115 3720,4195 3265,4195 3265,4275

## Silkscreen, mask and mechanical layers (free items; w line width, h text height)
Top Overlay:
  lines w10: 2970,3220 2970,3320 ; 3350.8,4475.49 3550.8,4475.49 ; 3495,3170 3795,3170 ; 4200,3170 4500,3170 ; 4930,2965 5130,2965 ; 5480.15,4453.3 5480.15,4553.3
  text "VM1P" at 3275.08,4345 h118.11
  text "VM1N" at 3275.08,3981.42 h118.11
  text "VM2N" at 5405.08,3800 h118.11
  text "12V" at 3275,3745 h86.61
  text "GND" at 3275,3385.9 h86.61
  text "VM2P" at 5070.08,3050 h118.11
Mechanical 1:
  lines w10: 2910,2905 5710,2905 5710,4770 2910,4770 2910,3430 2910,2905